# EAGLE board WheelDriver_RevC_newlayoutfinal (EAGLE 6.5.0)
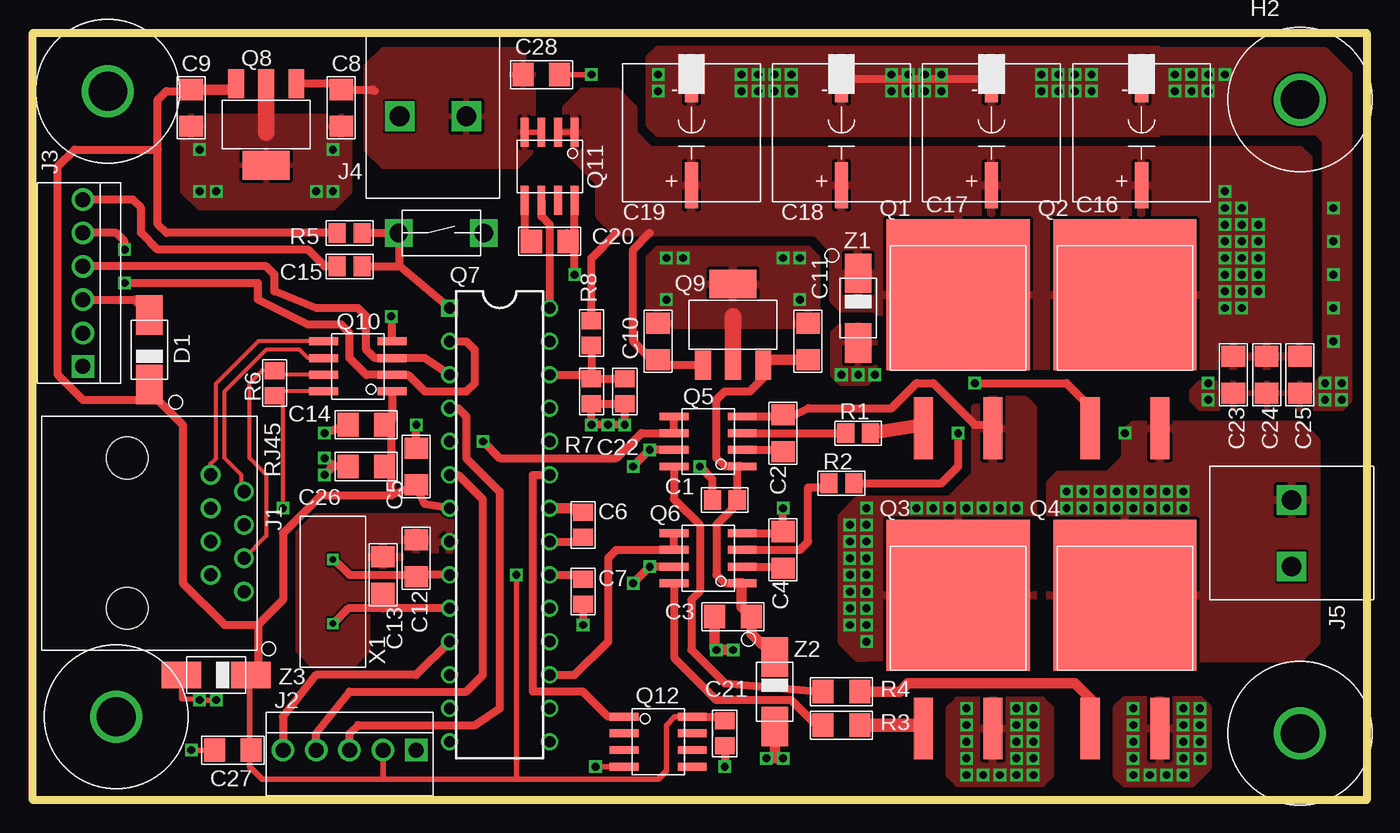
[diagram p0: board, top side]
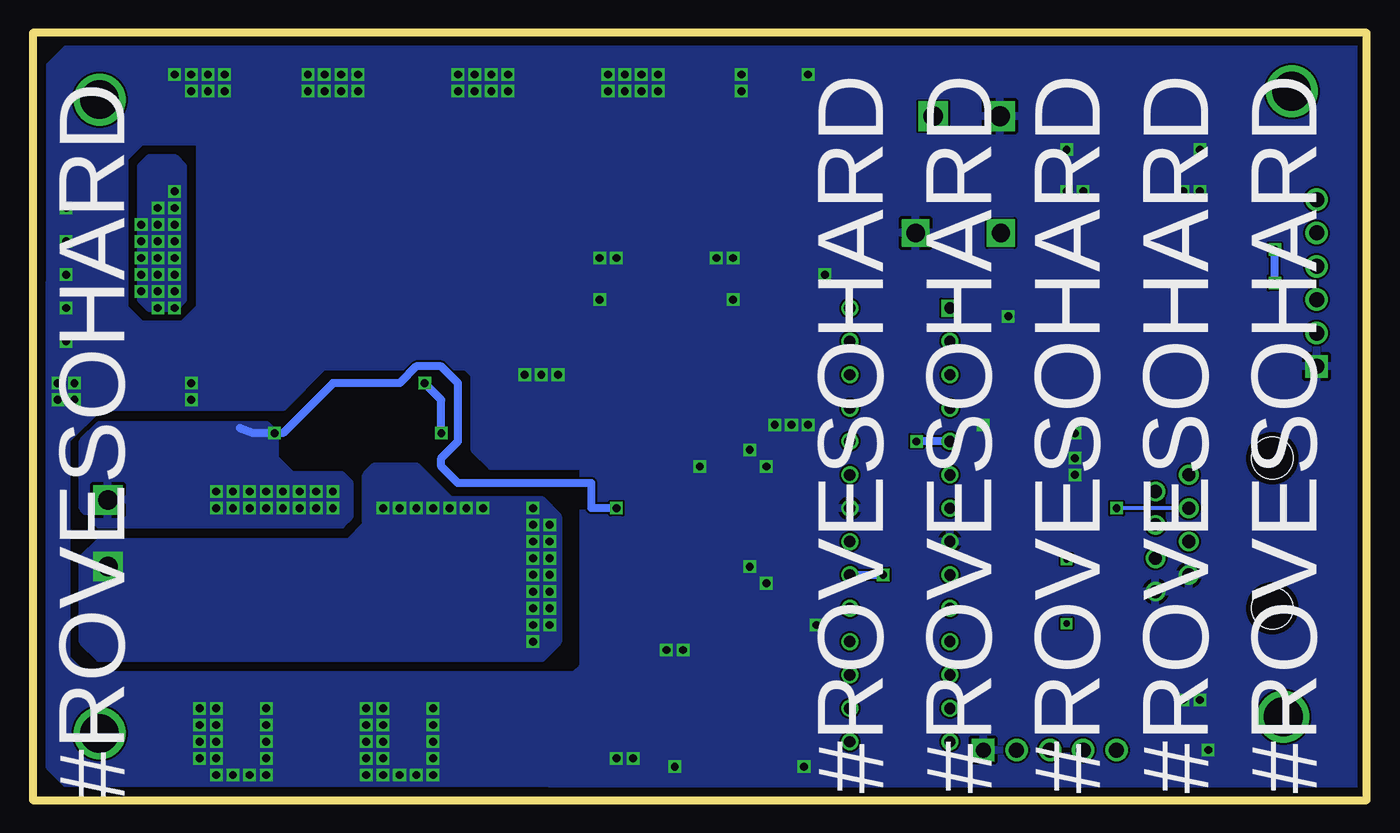
[diagram p1: board, bottom side, seen from below]

Size 101.6 x 58.42 mm. Coordinates in mm from the lower left corner, seen from the top.
Outline: 0,0 0,58.42 101.6,58.42 101.6,0 0,0
Copper layers (1*16): Top 0.0356mm / dielectric 1.5011mm / Bottom 0.0356mm
Design rules "OshPark": minimum track width 6mil, minimum drill 13mil, track to track 6mil, track to pad 6mil, pad to pad 6mil, via to via 6mil, smd to smd 6mil, copper to edge 15mil, drill to drill 6mil, minimum pad ring 7mil, minimum via ring 7mil, stop-mask expansion 3mil, vias tented up to drill 0mil, thermal gap 10mil

## Footprints (pad centres in the part's own frame; a part is rotated, then mirrored left to right if it is on the bottom)
C_0805 = smd 1.3 x 1.5: 1 -0.95,0; 2 0.95,0
C_1206 = smd 1.6 x 1.8: 1 -1.4,0; 2 1.4,0
C_10MMSM = smd 1 x 3.5: + 0,4; - 0,-4.1
DO-214AC = smd 3 x 2: A 2.65,0; C -2.65,0
H_MNTHOLE_#4 = drill 2.946: 1 0,0
RJ45-CAT5E = drill 1: 1 -4.445,4.655; 2 -3.175,7.195; 3 -1.905,4.655; 4 -0.635,7.195; 5 0.635,4.655; 6 1.905,7.195; 7 3.175,4.655; 8 4.445,7.195 | hole 3.2: 5.715,-1.695; -5.715,-1.695
J_MTA100_5P = drill 1.143 square: 1 5.08,0 | drill 1.143: 2 2.54,0; 3 0,0; 4 -2.54,0; 5 -5.08,0
J_MTA100_6P = drill 1.143 square: 1 6.35,0 | drill 1.143: 2 3.81,0; 3 1.27,0; 4 -1.27,0; 5 -3.81,0; 6 -6.35,0
THERM_BLOCK_2 = drill 1.5 square: P$1 2.54,0; P$2 -2.54,0
J_TOGGLE = drill 1.4 square: P$1 -3.25,0; P$2 3.25,0
TO-263 = smd 1.45 x 4.7: 1 -2.65,-9.15; 3 2.65,-9.15 | smd 10.9 x 11.5: 2 0,1
SOIC8 = smd 2.2 x 0.6: 1 -2.6,1.905; 2 -2.6,0.635; 3 -2.6,-0.635; 4 -2.6,-1.905; 5 2.6,-1.905; 6 2.6,-0.635; 7 2.6,0.635; 8 2.6,1.905
DIP28 = drill 0.864 square: 1 -16.51,-3.81 | drill 0.864: 2 -13.97,-3.81; 3 -11.43,-3.81; 4 -8.89,-3.81; 5 -6.35,-3.81; 6 -3.81,-3.81; 7 -1.27,-3.81; 8 1.27,-3.81; 9 3.81,-3.81; 10 6.35,-3.81; 11 8.89,-3.81; 12 11.43,-3.81; 13 13.97,-3.81; 14 16.51,-3.81; 15 16.51,3.81; 16 13.97,3.81; 17 11.43,3.81; 18 8.89,3.81; 19 6.35,3.81; 20 3.81,3.81; 21 1.27,3.81; 22 -1.27,3.81; 23 -3.81,3.81; 24 -6.35,3.81; 25 -8.89,3.81; 26 -11.43,3.81; 27 -13.97,3.81; 28 -16.51,3.81
SOT-223 = smd 1.2 x 2.2: 1 -2.3,-3.1; 2 0,-3.1; 3 2.3,-3.1 | smd 3.6 x 2.2: 4 0,3.1
R_0805 = smd 1.3 x 1.5: 1 -0.95,0; 2 0.95,0
R_1206 = smd 1.6 x 1.8: 1 -1.4,0; 2 1.4,0
HC-49 = drill 0.5 square: P$1 -2.44,0; P$2 2.44,0

## Placement (x,y rotation side)
C1  0.1uF  [C_0805]  52.7,22.86 180 top
C2  0.1uF  [C_1206]  57.15,27.94 90 top
C3  0.1uF  [C_1206]  53.34,13.97 180 top
C4  0.1uF  [C_1206]  57.15,19.05 90 top
C5  0.1uF  [C_1206]  29.21,25.4 270 top
C6  0.1uF  [C_0805]  41.91,20.95 90 top
C7  0.1uF  [C_0805]  41.91,15.88 270 top
C8  0.1uF  [C_1206]  23.5,52.7 270 top
C9  22uF  [C_1206]  12.06,52.7 270 top
C10  0.1uF  [C_1206]  47.62,34.92 90 top
C11  22uF  [C_1206]  59.05,34.92 90 top
C12  56nF  [C_1206]  29.21,18.41 270 top
C13  56nF  [C_1206]  26.67,17.14 270 top
C14  0.1uF  [C_1206]  25.4,28.57 180 top
C15  0.1uF  [C_0805]  24.13,40.64 0 top
C16  270uF  [C_10MMSM]  84.45,50.8 180 top
C17  270uF  [C_10MMSM]  73.03,50.8 180 top
C18  270uF  [C_10MMSM]  61.59,50.8 180 top
C19  270uF  [C_10MMSM]  50.16,50.8 180 top
C20  0.1uF  [C_1206]  39.37,42.55 180 top
C21  0.1uF  [C_0805]  52.7,5.08 270 top
C22  0.1uF  [C_0805]  45.09,31.11 270 top
C23  22uF  [C_1206]  91.44,32.38 270 top
C24  22uF  [C_1206]  93.98,32.38 270 top
C25  22uF  [C_1206]  96.52,32.38 270 top
C26  0.1uF  [C_1206]  25.4,25.4 180 top
C27  0.1uF  [C_1206]  15.24,3.81 180 top
C28  0.1uF  [C_1206]  38.73,55.24 0 top
D1  [DO-214AC]  8.89,34.29 90 top
H1  [H_MNTHOLE_#4]  96.52,5.08 0 top
H2  [H_MNTHOLE_#4]  96.52,53.34 0 top
H3  [H_MNTHOLE_#4]  6.35,6.35 0 top
H4  [H_MNTHOLE_#4]  5.71,53.98 0 top
J1  RJ45  [RJ45-CAT5E]  8.89,20.32 270 top
J2  ENC  [J_MTA100_5P]  24.13,3.81 0 top
J3  SER  [J_MTA100_6P]  3.81,39.37 270 top
J4  J_1546074-2  [THERM_BLOCK_2]  30.48,52.07 180 top
J5  J_1546074-2  [THERM_BLOCK_2]  95.89,20.32 90 top
J6  J_MC32857  [J_TOGGLE]  31.11,43.18 0 top
Q1  STB270N4F3  [TO-263]  70.48,37.47 0 top
Q2  STB270N4F3  [TO-263]  83.19,37.47 0 top
Q3  STB270N4F3  [TO-263]  70.48,14.61 0 top
Q4  STB270N4F3  [TO-263]  83.19,14.61 0 top
Q5  LM5101  [SOIC8]  51.44,27.3 180 top
Q6  LM5101  [SOIC8]  51.44,18.41 180 top
Q7  ATMEGA328P  [DIP28]  35.56,20.95 270 top
Q8  NCV8664ST50T3G  [SOT-223]  17.78,51.44 180 top
Q9  MIC2920A-12WS  [SOT-223]  53.34,36.2 0 top
Q10  LTC490  [SOIC8]  24.77,33.02 180 top
Q11  ACS711  [SOIC8]  39.37,48.26 270 top
Q12  LM35  [SOIC8]  47.62,4.45 0 top
R1  1  [R_0805]  62.87,27.94 0 top
R2  1  [R_0805]  61.59,24.13 0 top
R3  1  [R_1206]  61.59,5.71 0 top
R4  1  [R_1206]  61.59,8.26 0 top
R5  10k  [R_0805]  24.13,43.18 180 top
R6  120  [R_0805]  18.41,31.75 270 top
R7  10k  [R_0805]  42.55,31.11 90 top
R8  62k  [R_0805]  42.55,35.56 90 top
X1  16MHZ  [HC-49]  22.86,15.88 270 top
Z1  TVSDO214  [DO-214AC]  62.87,37.47 270 top
Z2  TVSDO214  [DO-214AC]  56.52,8.26 270 top
Z3  TVSDO214  [DO-214AC]  13.97,9.53 180 top

## Library data of the parts
C1-C22 C26-C28 D1 J1 J4-J6 Q1-Q12 R1-R8 X1 Z1-Z3 = Master
C23-C25 = Lib_Passive
H1-H4 J2 J3 = Lib_TH

## Nets
+5V: C5.2 C7.1 C9.1 C14.1 C21.1 C26.1 C27.1 D1.C J2.2 Q7.7 Q7.20 Q8.3 Q10.1 Q12.8 R5.2 Z3.C
+12V: C1.1 C3.1 C11.1 Q5.1 Q6.1 Q9.3 Z2.C
+24V: C10.1 C16.+ C17.+ C18.+ C19.+ C23.1 C24.1 C25.1 Q1.2 Q2.2 Q9.1 Q11.1 Q11.2 R8.2 Z1.C
A: J1.3 Q10.8 R6.2
B: J1.6 Q10.7 R6.1
EXTRESET: C15.1 J3.6
G1: Q5.3 R1.1
G1C: Q5.5 Q5.6 Q7.5
G2: Q6.3 R2.1
G2C: Q6.5 Q6.6 Q7.17
G3: Q6.8 R3.1
G4: Q5.8 R4.1
GND: C1.2 C3.2 C5.1 C6.2 C7.2 C8.2 C9.2 C10.2 C11.2 C12.1 C13.1 C14.2 C16.- C17.- C18.- C19.- C20.1 C21.2 C22.2 C23.2 C24.2 C25.2 C26.2 C27.2 C28.2 J1.7 J1.8 J2.1 J3.1 J4.P$1 J6.P$2 Q3.3 Q4.3 Q5.7 Q6.7 Q7.8 Q7.22 Q8.2 Q8.4 Q9.2 Q9.4 Q10.4 Q11.8 Q12.4 R7.1 Z1.A Z2.A Z3.A
IMEAS: Q7.28 Q11.6
INT0: J2.3 Q7.4
INT1: J2.4 Q7.6
MOTOR+: C2.2 J5.P$2 Q1.3 Q3.2 Q5.4
MOTOR-: C4.2 J5.P$1 Q2.3 Q4.2 Q6.4
N$1: Q1.1 R1.2
N$2: Q3.1 R3.2
N$3: Q2.1 R2.2
N$4: Q4.1 R4.2
N$5: C12.2 Q7.9 X1.P$1
N$6: C6.1 Q7.21
N$7: D1.A J3.3
N$9: C2.1 Q5.2
N$11: C4.1 Q6.2
N$12: C20.2 Q11.5
N$14: C13.2 Q7.10 X1.P$2
RESET: C15.2 J6.P$1 Q7.1 R5.1
RXD: J3.5 Q7.2 Q10.2
T1: J2.5 Q7.11
TMEAS: Q7.23 Q12.1
TXD: J3.4 Q7.3 Q10.3
VIN: C8.1 C28.1 J4.P$2 Q8.1 Q11.3 Q11.4
VMEAS: C22.1 Q7.26 R7.2 R8.1
Y: J1.1 Q10.5
Z: J1.2 Q10.6

## Tracks (layer width: path | path; a pad name or v marks a point on that pad's centre or on a via)
+5V  (via drill 0.6)
  Top 0.406: 36.83,1.59 47.62,1.59 48.26,2.22 48.26,5.71 48.9,6.35 Q12.8 | v36.83,17.14 36.83,1.59 | 36.83,1.59 26.67,1.59 | 26.67,1.59 17.46,1.59 16.51,2.54 16.51,3.81 | 16.51,3.81 16.51,9.41 Z3.C | C27.1 16.51,3.81 | J2.2 26.67,1.59
  Top 0.61: Q7.20 41.59,17.14 C7.1 | Q12.8 52.38,6.35 C21.1 | Q7.7 29.84,22.54 C5.2 27.3,23.18 | 27.3,23.18 21.91,23.18 19.05,20.32 19.05,15.24 17.14,13.34 | 9.53,49.53 3.17,49.53 1.91,48.26 1.91,32.38 3.81,30.48 8.89,30.48 | 9.53,49.53 9.53,53.34 10.16,53.98 11.94,53.98 | R5.2 10.16,43.18 9.53,43.81 9.53,49.53 | Q10.1 27.36,28.95 C14.1 27.3,28.57 27.3,24.77 | 27.3,24.77 27.3,23.18 | 8.89,30.48 9.53,30.48 11.43,28.57 11.43,16.51 14.61,13.34 17.14,13.34 | 17.14,13.34 17.14,9.53 | 17.14,9.53 Z3.C | 16.51,8.89 17.14,9.53 | D1.C 8.89,30.48 | C26.1 27.3,24.77
  Top 0.813: Q8.3 15.05,54.1 C9.1 11.94,53.98
  Bottom 0.61: Q7.20 v36.83,17.14
+12V
  Top 0.61: Q9.3 55.88,32.85 55.88,32.38 54.61,31.11 52.7,31.11 52.07,30.48 52.07,26.04 52.7,25.4 Q5.1 53.66,25.4 C1.1 53.66,22.54 52.07,20.95 52.07,17.14 52.7,16.51 53.66,16.51 | 53.98,16.51 Q6.1
  Top 0.813: C11.1 56.07,33.52 Q9.3 | 53.66,16.51 53.98,16.51 53.98,14.73 C3.1 54.74,12.68 Z2.C
+24V  (via drill 0.6)
  Top 0.406: Q11.2 Q11.1
  Top 0.61: Q9.1 48.05,33.09 C10.1 47.12,33.52 45.72,34.92 45.72,41.91 46.99,43.18 | R8.2 42.55,41.27 44.45,43.18
  other vias: 90.81,38.73 92.08,38.73 90.81,40.01 92.08,40.01 90.81,41.27 92.08,41.27 92.08,42.55 90.81,42.55 90.81,43.81 92.08,43.81 90.81,45.09 92.08,45.09 90.81,37.47 92.08,37.47 93.34,38.73 93.34,40.01 93.34,41.27 93.34,42.55 93.34,43.81 90.81,46.35
  pour Top: 95.89,33.02 66.04,33.02 64.77,34.29 64.77,41.91 63.5,43.18 44.45,43.18 43.18,44.45 43.18,46.99 40.64,49.53 40.64,52.7 41.91,53.98 44.45,53.98 45.72,52.7 45.72,50.8 46.99,49.53 96.52,49.53 97.16,48.9 97.16,34.29
  pour Bottom: 90.17,38.1 90.81,37.47 92.71,37.47 93.34,38.1 93.34,48.26 92.71,48.9 90.81,48.9 90.17,48.26
  pour Top: 59.69,43.18 60.96,41.91 60.96,38.1 61.59,37.47 64.14,37.47 64.77,36.83 64.77,34.29 70.48,34.29 71.12,34.92 71.12,45.09 59.69,45.09
A  (via drill 0.6)
  Top 0.305: Q10.8 18.73,31.11 R6.2 19.05,30.16 v19.05,22.23
  Top 0.61: 18.1,31.11 R6.2
  Bottom 0.305: J1.3 v19.05,22.23
B
  Top 0.305: Q10.7 18.73,32.38 R6.1 17.46,32.7 16.51,31.75 16.51,26.04 17.78,24.77 17.78,20.11 J1.6
EXTRESET
  Top 0.61: C15.1 22.23,40.64 20.95,41.91 9.53,41.91 8.26,43.18 8.26,45.09 7.62,45.72 J3.6
G1
  Top 0.61: Q5.3 R1.1
G1C  (via drill 0.6)
  Top 0.61: Q5.5 Q5.6 46.35,27.94 44.45,26.04 35.56,26.04 v34.29,27.3
  Bottom 0.61: Q7.5 v34.29,27.3
G2
  Top 0.61: Q6.3 58.42,19.05 59.05,19.68 59.05,23.81 60.33,23.81 R2.1
G2C
  Top 0.61: Q6.5 Q6.6 44.45,19.05 43.81,18.41 43.81,12.06 41.27,9.53 Q7.17
G3
  Top 0.61: R3.1 59.69,5.71 57.78,7.62 52.07,7.62 48.9,10.79 48.9,16.45 Q6.8
G4
  Top 0.61: Q5.8 48.84,22.92 50.8,20.95 50.8,15.88 50.16,15.24 50.16,11.43 52.7,8.89 R4.1
GND  (via drill 0.6)
  Top 0.305: Q11.8 41.27,43.05 C20.1
  Top 0.406: 45.09,2.54 v42.86,2.54 | C27.2 v12.06,3.81 | 11.32,9 11.32,7.73 v13.97,7.62 v12.7,7.62 | C28.2 v42.55,55.24
  Top 0.61: Q6.7 v46.99,17.78 v45.72,16.51 | Q5.7 v46.99,26.67 v45.72,25.4 | C1.2 51.76,24.45 v50.8,25.4 | 40.64,43.18 C20.1 | v41.27,40.01 Q11.8 | R7.1 C22.2 v45.09,28.57 v43.81,28.57 v42.55,28.57 42.55,30.48 | C17.- C18.- | C21.2 v52.7,2.54 | 45.09,2.54 Q12.4 | Q10.4 27.36,36.77 v27.3,36.83 | C14.2 v22.23,27.94 | C5.1 v29.21,28.57 | C7.2 v41.91,13.34 | Z3.A 11.32,9 | C26.2 22.86,25.4 | v22.23,24.77 22.86,25.4 | 22.86,25.4 v22.23,26.04
  Top 0.813: Q7.22 40.95,22.23 C6.2 | Z2.A 56.52,3.17 | 56.52,3.17 v55.88,3.17 | 56.52,3.17 v57.15,3.17 | C3.2 51.94,11.56 v52.07,11.43 v53.34,11.43
  Top 1.27: Q9.2 53.34,36.83 | Q8.2 17.78,50.8
  other vias: 71.12,6.99 71.12,5.71 71.12,4.45 71.12,3.17 71.12,1.91 72.39,1.91 73.66,1.91 74.93,1.91 83.82,5.71 83.82,4.45 83.82,6.99 74.93,3.17 76.2,4.45 74.93,4.45 74.93,5.71 74.93,6.99 76.2,6.99 76.2,5.71 76.2,3.17 76.2,1.91 83.82,3.17 83.82,1.91 85.09,1.91 86.36,1.91 87.63,1.91 88.9,3.17 87.63,3.17 87.63,4.45 87.63,5.71 87.63,6.99 88.9,6.99 88.9,5.71 88.9,4.45 66.67,55.24 48.26,41.27 49.53,41.27 57.15,41.27 58.42,41.27 48.26,38.1 58.42,38.1 12.7,49.53 22.86,49.53 12.7,46.35 13.97,46.35 21.59,46.35 22.86,46.35 89.53,31.75 89.53,30.48 98.42,31.75 99.69,31.75 98.42,30.48 99.69,30.48 61.59,32.38 62.87,32.38 64.14,32.38 88.27,55.24 89.53,55.24 88.27,53.98 89.53,53.98 79.38,55.24 78.11,55.24 78.11,53.98 79.38,53.98 67.94,55.24 66.67,53.98 67.94,53.98 56.52,55.24 55.24,55.24 55.24,53.98 56.52,53.98 87,55.24 87,53.98 80.64,55.24 80.64,53.98 76.83,55.24 76.83,53.98 69.22,55.24 69.22,53.98 57.78,55.24 57.78,53.98 53.98,55.24 53.98,53.98 65.41,55.24 65.41,53.98 47.62,55.24 47.62,53.98 90.81,55.24 99.06,45.09 99.06,42.55 99.06,40.01 99.06,37.47 99.06,34.92
  pour Bottom: 62.23,57.15 59.69,55.88 59.69,2.54 62.23,1.27 0,1.27 -1.27,2.54 -1.27,55.88 0,57.15
  pour Bottom: 59.05,1.27 88.27,1.27 89.53,2.54 89.53,8.26 88.27,9.53 60.33,9.53 59.69,10.16 59.05,10.16
  pour Top: 70.48,7.62 76.83,7.62 77.47,6.99 77.47,1.91 76.83,1.27 70.48,1.27 69.85,1.91 69.85,6.99
  pour Top: 88.9,7.62 83.19,7.62 82.55,6.99 82.55,1.91 83.19,1.27 88.27,1.27 89.53,2.54 89.53,6.99
  pour Bottom: 59.69,57.15 87,57.15 88.9,55.24 88.9,34.29 87.63,33.02 65.41,33.02 64.14,31.75 59.69,31.75
  pour Top: 86.36,51.44 86.36,56.52 85.72,57.15 47.62,57.15 46.99,56.52 46.99,51.44 47.62,50.8 85.72,50.8
  pour Top: 59.69,36.2 59.69,41.27 59.05,41.91 47.62,41.91 46.99,41.27 46.99,36.2
  pour Top: 11.43,52.07 24.13,52.07 24.13,46.35 22.86,45.09 12.7,45.09 11.43,46.35
  pour Bottom: 84.45,1.27 99.06,1.27 100.33,2.54 100.33,39.37 99.06,39.37 99.06,10.79 97.79,9.53 84.45,9.53
  pour Top: 85.09,57.15 98.42,57.15 100.33,55.24 100.33,30.48 99.69,29.84 88.9,29.84 88.27,30.48 88.27,31.11 88.9,31.75 97.79,31.75 98.42,32.38 98.42,50.16 97.79,50.8 85.09,50.8
  pour Bottom: 99.06,27.3 96.52,29.84 82.55,29.84 79.38,33.02 79.38,36.2 100.33,36.2 100.33,27.3
  pour Top: 63.5,36.2 61.59,36.2 60.96,35.56 60.96,32.38 61.59,31.75 63.5,31.75 64.14,32.38 64.14,35.56
  pour Top: 31.75,19.05 28.57,19.05 27.3,17.78 25.4,17.78 25.4,11.43 24.13,10.16 21.59,10.16 20.32,11.43 20.32,20.32 21.59,21.59 31.75,21.59
  pour Bottom: 88.27,38.1 90.17,36.2 93.34,36.2 94.61,37.47 94.61,48.9 93.34,50.16 88.27,50.16 88.27,55.88 87,57.15 99.06,57.15 100.33,55.88 100.33,33.66 87,33.66 87,38.1
  pour Bottom: 56.52,25.4 66.67,25.4 67.94,26.67 67.94,32.38 69.22,33.66 69.22,36.2 56.52,36.2
IMEAS
  Top 0.61: Q11.6 38.73,44.45 39.37,43.81 Q7.28
INT0
  Top 0.61: J2.3 24.13,5.08 24.77,5.71 33.66,5.71 35.56,6.99 35.56,23.5 33.02,26.04 33.02,29.21 32.38,29.84 Q7.4
INT1
  Top 0.61: J2.4 21.59,5.08 24.13,8.26 33.02,8.26 34.29,9.53 34.29,22.86 32.38,24.77 Q7.6
MOTOR+  (via drill 0.6)
  Top 0.61: Q5.4 57.15,29.21 | 57.15,29.21 C2.2 | 57.15,29.21 57.78,29.21 59.05,29.84 65.41,29.84 67.31,31.75 68.58,31.75 71.75,28.57 72.88,28.57 Q1.3
  Top 1.27: 73.14,18.25 Q3.2
  other vias: 63.5,22.23 62.23,20.95 62.23,18.41 62.23,19.68 62.23,17.14 62.23,15.88 62.23,14.61 62.23,13.34 63.5,12.06 63.5,13.34 63.5,14.61 63.5,15.88 63.5,17.14 63.5,18.41 63.5,19.68 63.5,20.95 67.31,22.23 68.58,22.23 69.85,22.23 71.12,22.23 72.39,22.23 73.66,22.23 74.93,22.23
  pour Top: 75.56,30.48 72.39,30.48 71.75,29.84 71.75,24.77 69.85,22.86 64.77,22.86 63.5,21.59 63.5,11.43 76.2,10.79 76.2,29.84
  pour Bottom (no thermals): 96.52,19.68 77.47,19.68 76.2,20.95 76.2,24.77 75.56,25.4 72.39,25.4 69.85,22.86 62.87,22.86 61.59,21.59 61.59,12.06 62.87,10.79 96.52,10.79 97.79,12.06 97.79,18.41
  pour Top: 75.56,22.86 62.87,22.86 61.59,21.59 61.59,12.06 62.87,10.79 75.56,11.43
MOTOR-  (via drill 0.6)
  Top 0.61: Q6.4 57.15,20.32 C4.2 v57.15,22.23
  Bottom 0.61: v57.15,22.23 59.05,22.23 59.05,24.13 69.22,24.13 70.48,25.4 70.48,26.04 69.22,27.3 69.22,31.75 70.48,33.02 72.39,33.02 73.66,31.75 78.74,31.75 82.55,27.94 v83.19,27.94 84.83,27.94 Q2.3
  other vias: 80.01,22.23 81.28,22.23 82.55,22.23 83.82,22.23 85.09,22.23 86.36,22.23 87.63,22.23 78.74,22.23 78.74,23.5 87.63,23.5 86.36,23.5 85.09,23.5 83.82,23.5 82.55,23.5 81.28,23.5 80.01,23.5
  pour Top: 84.45,20.95 96.52,20.95 97.79,22.23 97.79,27.3 96.52,28.57 83.82,28.57 83.19,27.94 83.19,22.23
  pour Top: 83.19,26.04 81.92,24.77 78.11,24.77 77.47,24.13 77.47,10.79 96.52,10.79 97.79,12.06 97.79,26.04
  pour Bottom: 78.11,24.77 77.47,24.13 77.47,21.59 78.11,20.95 96.52,20.95 97.79,22.23 97.79,27.3 96.52,28.57 83.82,28.57 83.19,27.94 83.19,26.04 81.92,24.77
N$1
  Top 1.016: R1.2 67.83,28.57 Q1.1
N$2
  Top 1.016: R3.2 67.83,5.71 Q3.1
N$3  (via drill 0.6)
  Top 0.61: R2.2 69.22,24.13 70.48,25.4 v70.48,27.94 | v71.75,31.75 78.74,31.75 80.64,29.84 80.64,28.43 Q2.1
  Bottom 0.61: v70.48,27.94 70.48,30.48 v71.75,31.75
N$4
  Top 0.813: Q4.1 80.53,7.73 79.38,8.89 66.67,8.89 66.04,8.26 R4.2
N$5
  Top 0.61: X1.P$1 22.96,18.32 24.13,17.14 29.08,17.14 C12.2 29.53,17.14 | Q7.9 29.53,17.14 | 29.53,17.14 29.21,17.14
N$6
  Top 0.61: Q7.21 41.59,19.68 C6.1
N$7
  Top 0.61: J3.3 7.73,38.1 D1.A
N$9
  Top 0.61: Q5.2 57.15,26.67 C2.1
N$11
  Top 0.61: Q6.2 57.15,17.78 C4.1
N$12
  Top 0.61: Q11.5 37.47,43.05 C20.2
N$14
  Top 0.61: Q7.10 26.67,14.61 | 26.67,14.61 24.03,14.61 X1.P$2 | C13.2 26.67,14.61
RESET
  Top 0.61: R5.1 J6.P$1 27.94,43.1 27.94,40.64 | C15.2 27.94,40.64 | Q7.1 27.94,40.64
RXD  (via drill 0.6)
  Top 0.61: Q7.2 33.02,34.92 33.66,34.29 33.66,31.75 33.02,31.11 29.84,31.11 28.57,32.38 Q10.2 25.4,32.38 24.13,33.66 24.13,35.56 23.5,36.2 20.95,36.2 17.14,38.1 17.14,39.37 v6.99,39.37 | v6.99,41.91 6.99,42.55 6.35,43.18 J3.5
  Bottom 0.61: v6.99,39.37 v6.99,41.91
T1
  Top 0.61: Q7.11 29.21,9.53 21.59,9.53 19.05,6.35 J2.5
TMEAS
  Top 0.61: Q12.1 43.81,6.35 41.91,8.26 38.1,8.26 38.1,24.77 Q7.23
TXD
  Top 0.61: Q7.3 29.84,33.66 Q10.3 26.04,33.66 25.4,34.29 25.4,36.83 24.77,37.47 21.59,37.47 18.41,38.73 18.41,40.01 17.78,40.64 J3.4
VIN
  Top 0.406: Q11.3 Q11.4
  Top 0.61: 26.04,53.98 25.91,54.1 C8.1 23.07,54.53 Q8.1
  pour Top: 36.83,48.26 38.1,49.53 38.1,55.88 36.83,57.15 26.67,57.15 25.4,55.88 25.4,49.53 26.67,48.26
VMEAS
  Top 0.61: Q7.26 42.23,32.38 R7.2 | R7.2 C22.1 | R8.1 R7.2 | 42.55,31.75 R7.2
Y
  Top 0.305: J1.1 13.54,25.61 13.97,26.04 13.97,31.75 17.14,34.92 Q10.5
Z
  Top 0.305: Q10.6 20.95,33.66 20.32,34.29 17.78,34.29 14.61,31.11 14.61,26.04 15.88,24.77 15.88,23.7 J1.2

## Text on the board
bNames: #ROVESOHARD | #ROVESOHARD | #ROVESOHARD | #ROVESOHARD | #ROVESOHARD | #ROVESOHARD